# Altium PCB PCB.PcbDoc
Units mm, origin at the board's own origin, x right, y up, seen from the top; angles counter-clockwise.
Board outline 42.93 x 45.72 mm, 2 copper layers (Top Layer, Bottom Layer); 12 components, 13 nets, 57 pads, 4 vias.
Unrouted connection lines stored in the file: 3.
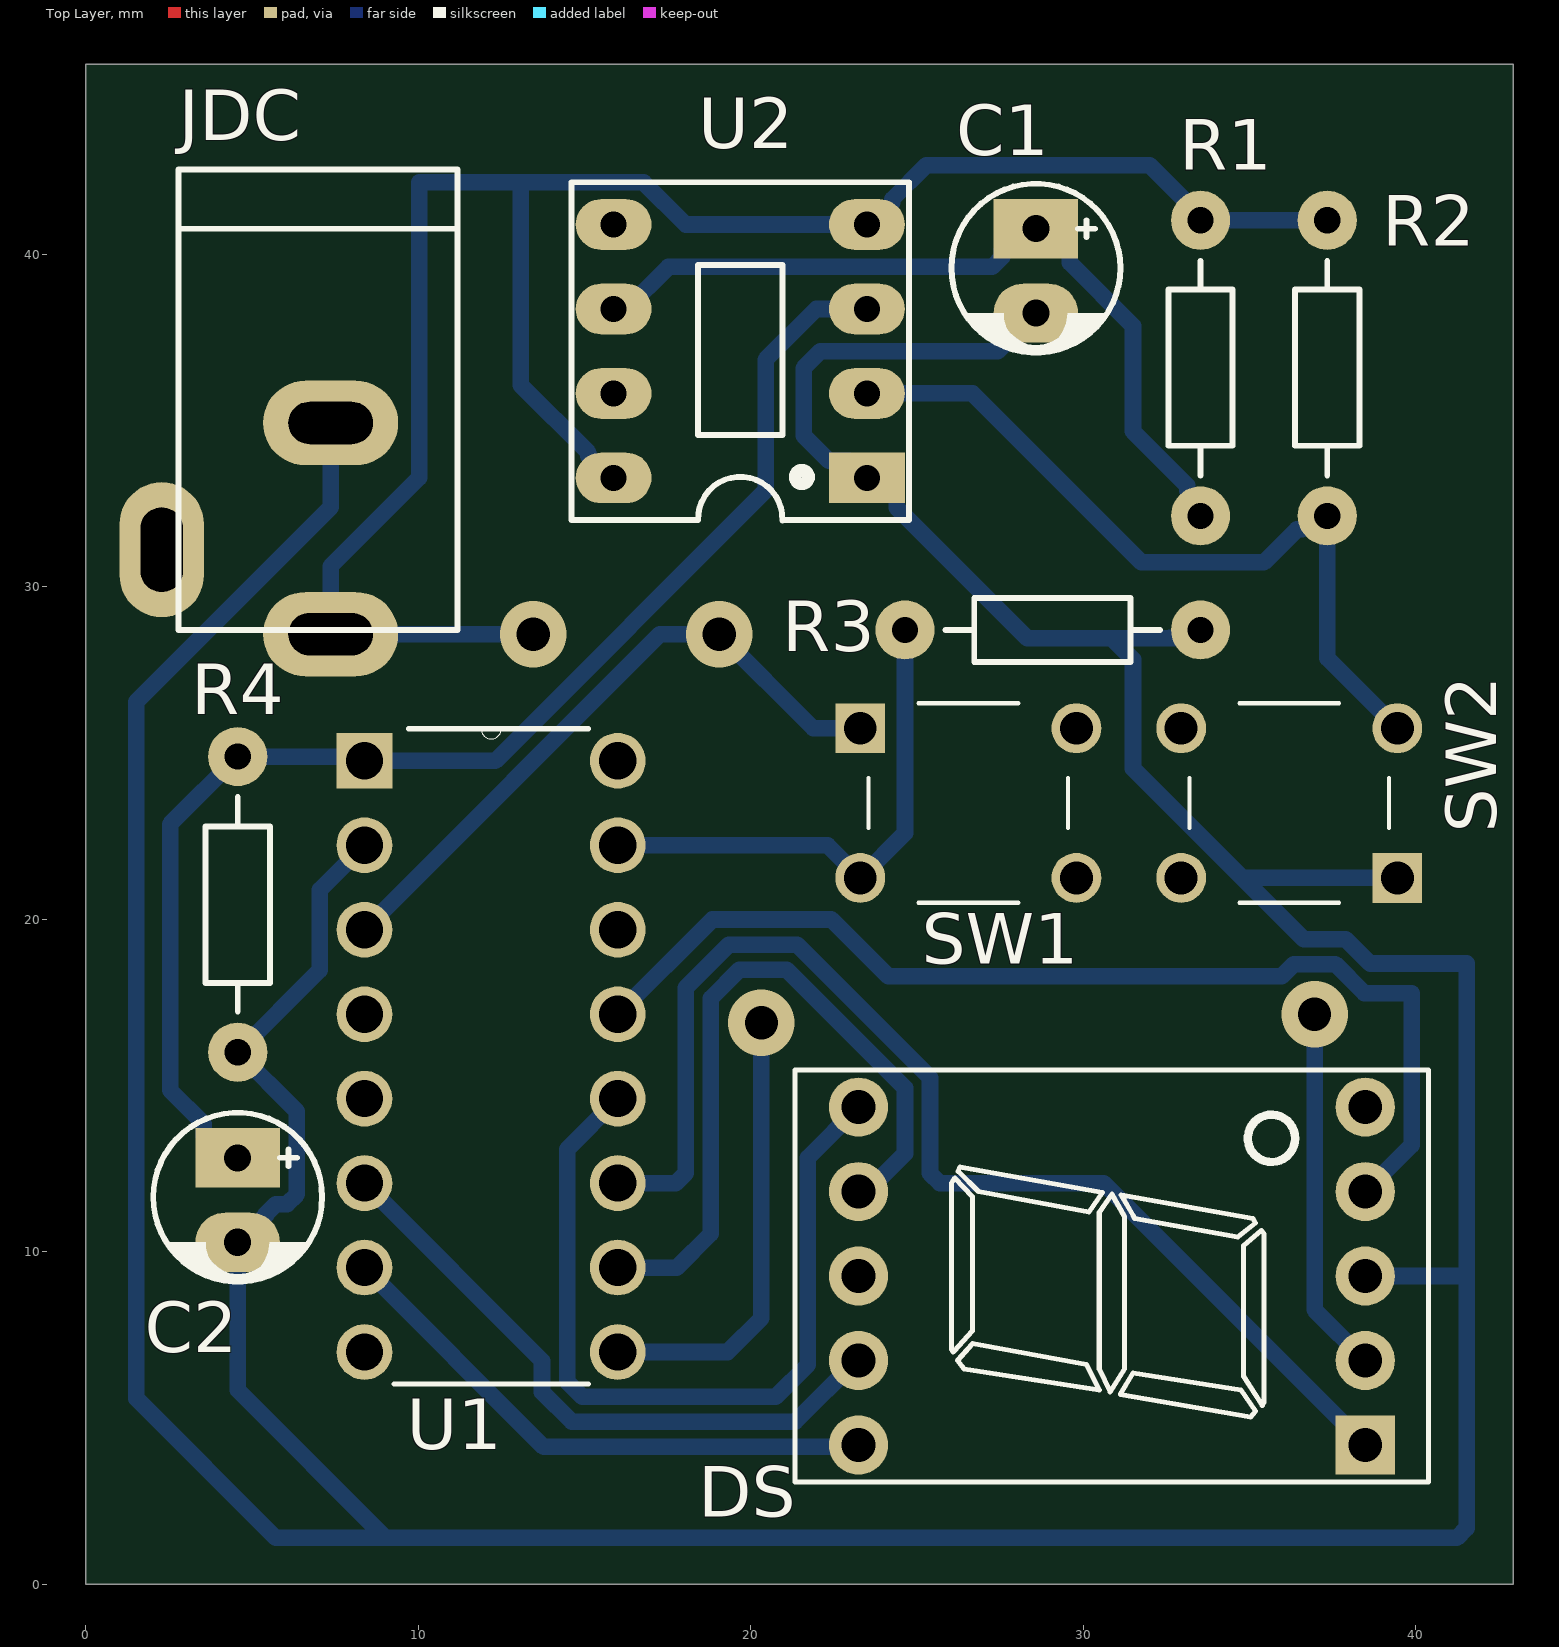
[diagram p0: Top Layer view]
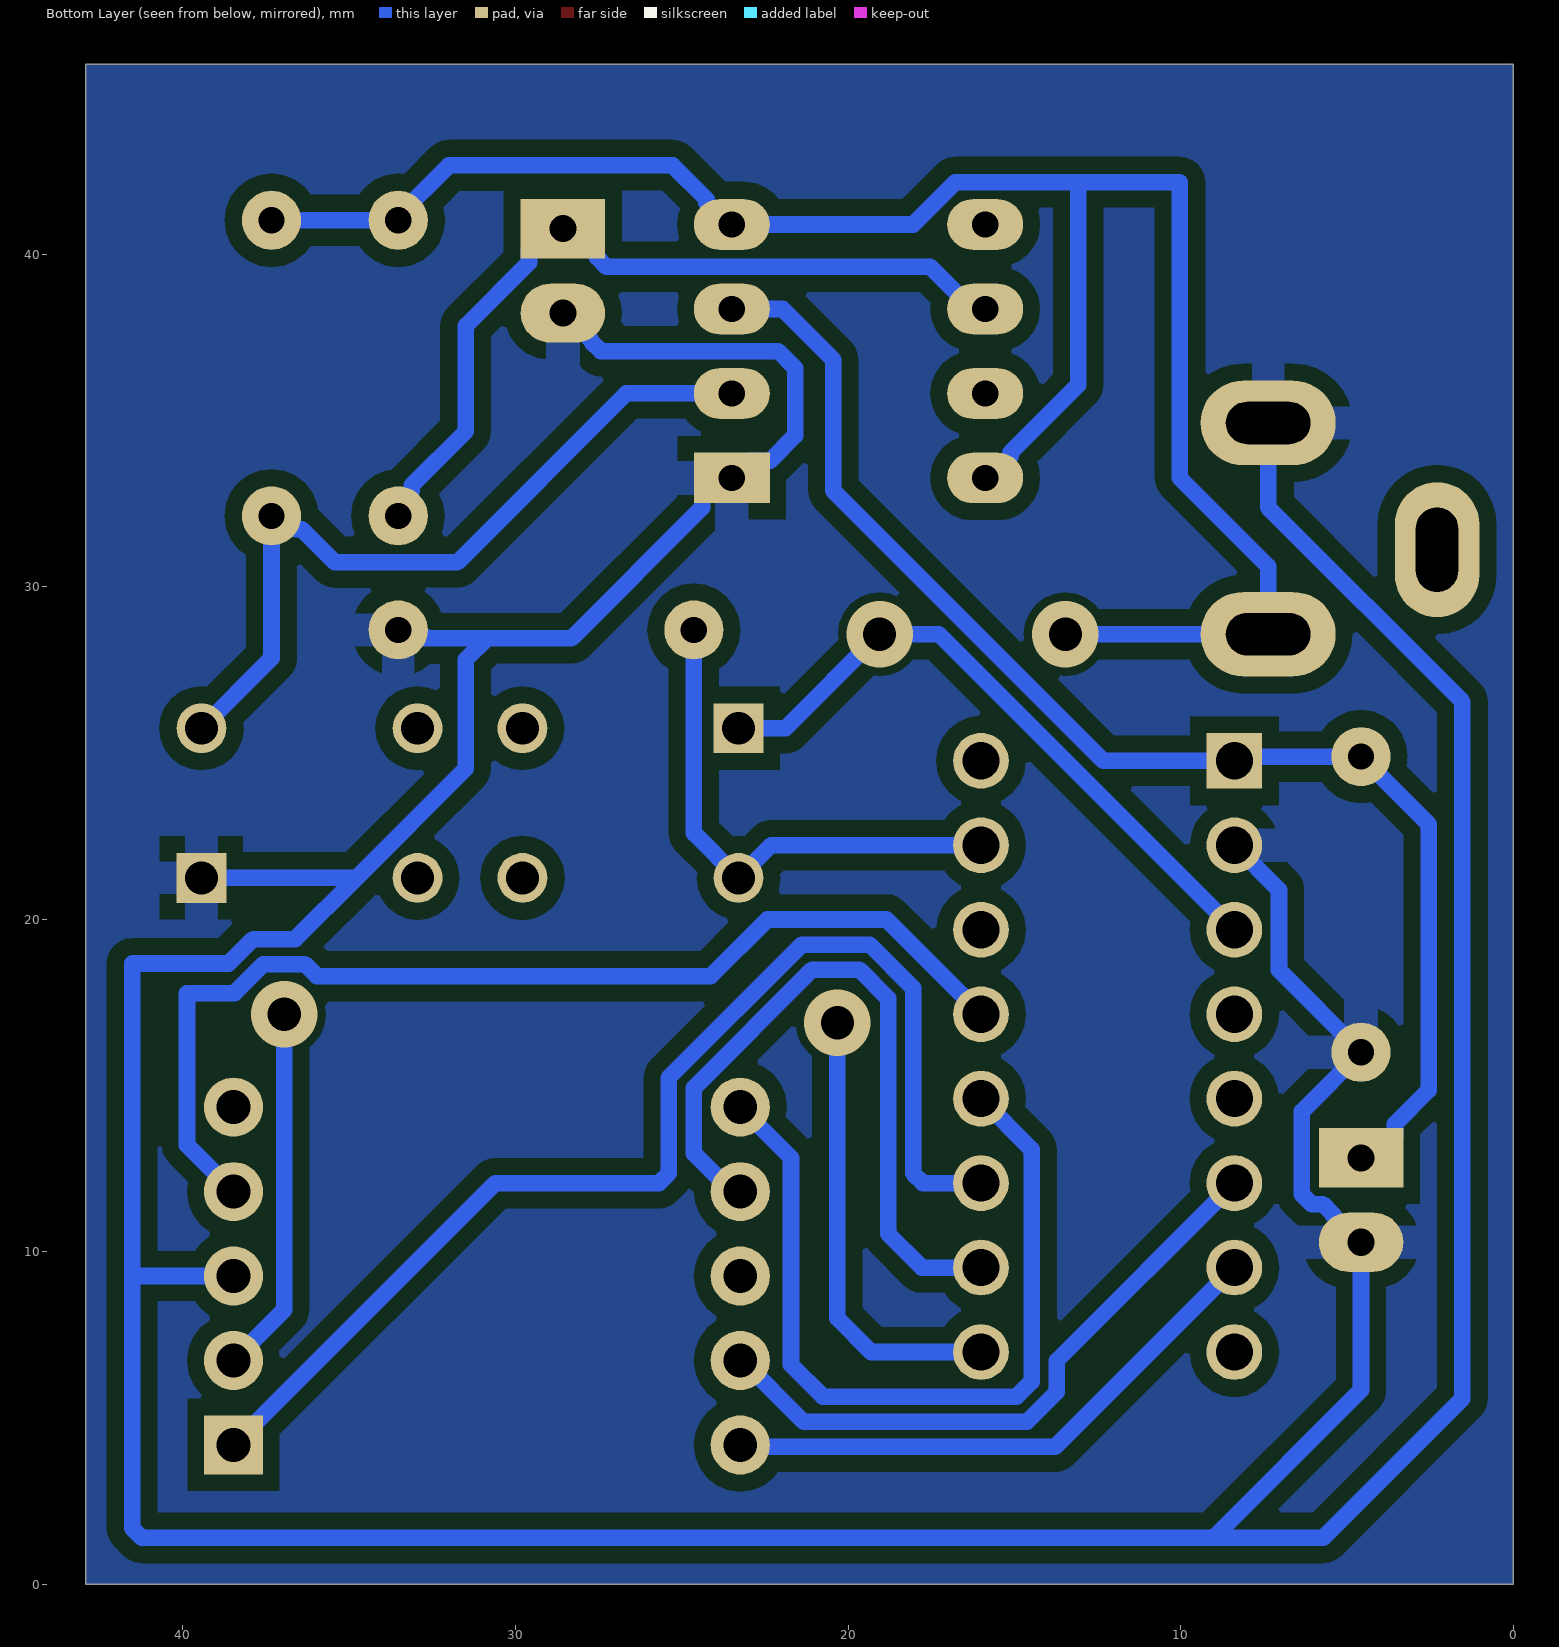
[diagram p1: Bottom Layer view, seen from below]
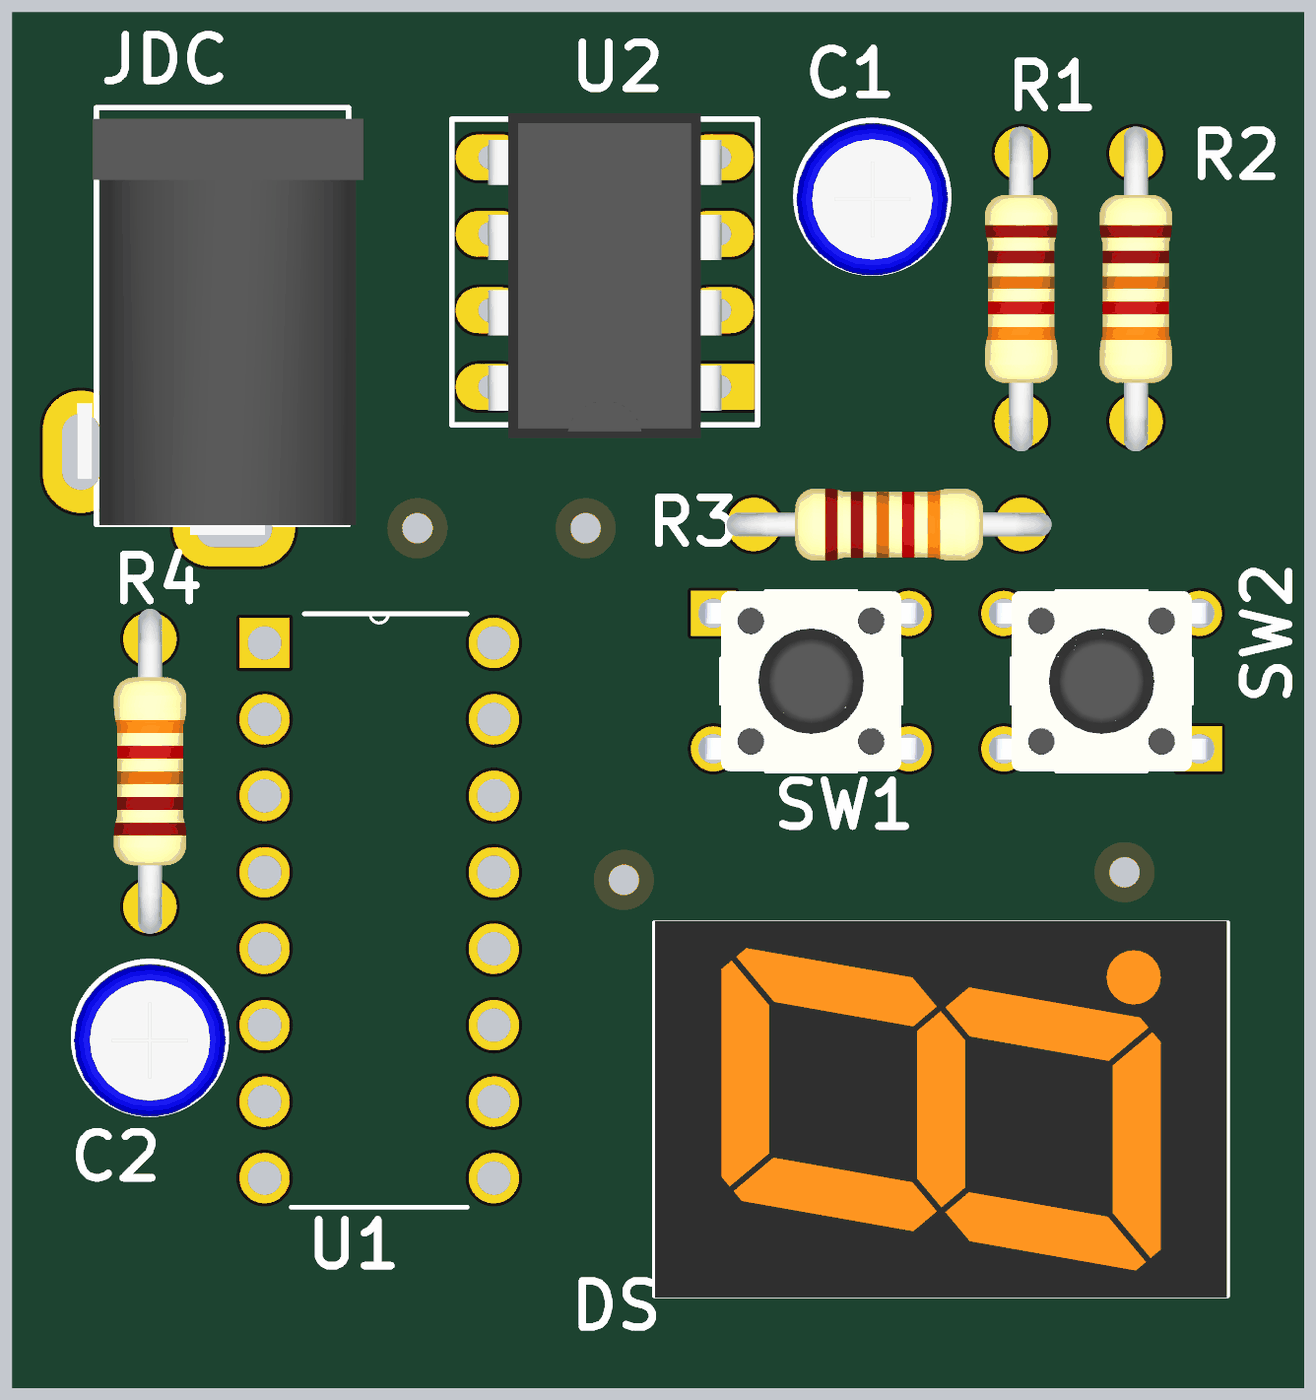
[diagram p2: 3D render of the assembled board from above, using the file's embedded part models]

## Layer stack, top to bottom
Top Solder: solder mask 0.0102, Solder Resist, Dk 3.5
Top Layer: signal copper 0.0356
Dielectric 1: dielectric 0.32, FR-4, Dk 4.8
Bottom Layer: signal copper 0.0356
Bottom Solder: solder mask 0.0102, Solder Resist, Dk 3.5

## Board outline
0,0 42.926,0 42.926,45.72 0,45.72

## Design rules (kind name [scope] priority, off if disabled: settings)
Clearance Clearance_8 [InNamedPolygon('GND_L02_P014')] p1: gap=0.254 ignorepadtopadclearanceinfootprint=FALSE except(0: Arc-Hole Track-Hole SMDPad-Hole THPad-Hole Via-Hole Fill-Hole Poly-Hole Region-Hole Text-Hole; 0.508: Arc-Fill Arc-Poly Arc-Region Track-Fill Track-Poly Track-Region THPad-Fill THPad-Poly THPad-Region)
Clearance Clearance_7 [InNamedPolygon('GND_L02_P014')] p2: gap=0.254 ignorepadtopadclearanceinfootprint=FALSE except(0: Arc-Hole Track-Hole SMDPad-Hole THPad-Hole Via-Hole Fill-Hole Poly-Hole Region-Hole Text-Hole; 0.508: Arc-Fill Arc-Poly Arc-Region Track-Fill Track-Poly Track-Region THPad-Fill THPad-Poly THPad-Region)
Clearance Clearance_6 [InNamedPolygon('GND_L02_P010')] p3: gap=0.254 ignorepadtopadclearanceinfootprint=FALSE except(0: Arc-Hole Track-Hole SMDPad-Hole THPad-Hole Via-Hole Fill-Hole Poly-Hole Region-Hole Text-Hole; 0.508: Arc-Fill Arc-Poly Arc-Region Track-Fill Track-Poly Track-Region THPad-Fill THPad-Poly THPad-Region)
Clearance Clearance_5 [InNamedPolygon('GND_L02_P014')] p4: gap=0.254 ignorepadtopadclearanceinfootprint=FALSE except(0: Arc-Hole Track-Hole SMDPad-Hole THPad-Hole Via-Hole Fill-Hole Poly-Hole Region-Hole Text-Hole; 0.508: Arc-Fill Arc-Poly Arc-Region Track-Fill Track-Poly Track-Region THPad-Fill THPad-Poly THPad-Region)
Clearance Clearance_4 [InNamedPolygon('NONET_L02_P010')] p5: gap=0.254 ignorepadtopadclearanceinfootprint=FALSE except(0: Arc-Hole Track-Hole SMDPad-Hole THPad-Hole Via-Hole Fill-Hole Poly-Hole Region-Hole Text-Hole; 0.508: Arc-Fill Arc-Poly Arc-Region Track-Fill Track-Poly Track-Region THPad-Fill THPad-Poly THPad-Region)
Clearance Clearance_3 [InNamedPolygon('+5_L02_P002')] p6: gap=0.254 ignorepadtopadclearanceinfootprint=FALSE except(0: Arc-Hole Track-Hole SMDPad-Hole THPad-Hole Via-Hole Fill-Hole Poly-Hole Region-Hole Text-Hole; 0.5: Arc-Fill Arc-Poly Arc-Region Track-Fill Track-Poly Track-Region THPad-Fill THPad-Poly THPad-Region)
Clearance Clearance_2 [InNamedPolygon('+5_L02_P002')] p7: gap=0.254 ignorepadtopadclearanceinfootprint=FALSE except(0: Arc-Hole Track-Hole SMDPad-Hole THPad-Hole Via-Hole Fill-Hole Poly-Hole Region-Hole Text-Hole; 0.508: Arc-Fill Arc-Poly Arc-Region Track-Fill Track-Poly Track-Region THPad-Fill THPad-Poly THPad-Region)
Clearance Clearance_1 [InNamedPolygon('+5_L02_P000')] p8: gap=0.254 ignorepadtopadclearanceinfootprint=FALSE except(0: Arc-Hole Track-Hole SMDPad-Hole THPad-Hole Via-Hole Fill-Hole Poly-Hole Region-Hole Text-Hole; 0.5: Arc-Fill Arc-Poly Arc-Region Track-Fill Track-Poly Track-Region)
Clearance [All] p9: gap=0.254 ignorepadtopadclearanceinfootprint=FALSE except(0: Arc-Hole Track-Hole SMDPad-Hole THPad-Hole Via-Hole Fill-Hole Poly-Hole Region-Hole Text-Hole)
PolygonConnect PolygonConnect_9 [All vs IsNamedPolygon('GND_L02_P014')] p1: connectstyle=Relief reliefconductorwidth=1 reliefentries=4 polygonreliefangle="90 Angle" airgapwidth=0.5
PolygonConnect PolygonConnect_8 [All vs IsNamedPolygon('GND_L02_P014')] p2: connectstyle=Relief reliefconductorwidth=1 reliefentries=4 polygonreliefangle="90 Angle" airgapwidth=0.5
PolygonConnect PolygonConnect_7 [All vs IsNamedPolygon('GND_L02_P010')] p3: connectstyle=Relief reliefconductorwidth=1 reliefentries=4 polygonreliefangle="90 Angle" airgapwidth=0.5
PolygonConnect PolygonConnect_6 [All vs IsNamedPolygon('GND_L02_P014')] p4: connectstyle=Relief reliefconductorwidth=0.254 reliefentries=4 polygonreliefangle="90 Angle" airgapwidth=0.5
PolygonConnect PolygonConnect_5 [All vs IsNamedPolygon('GND_L02_P014')] p5: connectstyle=Relief reliefconductorwidth=1 reliefentries=4 polygonreliefangle="90 Angle" airgapwidth=0.5
PolygonConnect PolygonConnect_4 [All vs IsNamedPolygon('GND_L02_P010')] p6: connectstyle=Relief reliefconductorwidth=1 reliefentries=4 polygonreliefangle="90 Angle" airgapwidth=0.5
PolygonConnect PolygonConnect_3 [All vs IsNamedPolygon('GND_L02_P014')] p7: connectstyle=Relief reliefconductorwidth=1 reliefentries=4 polygonreliefangle="90 Angle" airgapwidth=0.5
PolygonConnect PolygonConnect_2 [All vs IsNamedPolygon('GND_L02_P014')] p8: connectstyle=Relief reliefconductorwidth=0.254 reliefentries=4 polygonreliefangle="90 Angle" airgapwidth=0.5
PolygonConnect PolygonConnect_1 [All vs IsNamedPolygon('+5_L02_P000')] p9: connectstyle=Relief reliefconductorwidth=1 reliefentries=4 polygonreliefangle="90 Angle" airgapwidth=0.5
PolygonConnect [All] p10: connectstyle=Relief reliefconductorwidth=0.254 reliefentries=4 polygonreliefangle="90 Angle" airgapwidth=0.254
RoutingVias [All] p1: holewidth=0.711 width=1.27 viastyle="Through Hole" minholewidth=0.711 minwidth=1.27 maxholewidth=0.711 maxwidth=1.27
SolderMaskExpansion [All] p1: expansion=0.102
Width [All] p1: maxlimit=2 minlimit=0.254 preferedwidth=1 toplayer_maxwidth=0.254 toplayer_prefwidth=0.254 bottomlayer_minwidth=0.5 minimp=50.000000 maximp=50.000000 favimp=50.000000
30 further rules are at their usual default settings.

## Components (designator, comment, footprint, x,y, rotation, side; value= is the part's Value field where it differs from the comment)
C1 "1uF" CP1/2 28.575,40.767 r270 top value=10uF/50V
C2 "22uF" CP1/2 4.572,12.827 r270 top value=10uF/50V
DS "7SEG" LED7SEG-1-0.56 31.496,9.144 r90 top
JDC "Jac DC" DC0 4.826,31.75 r270 top
R1 "10K" R1/4W 33.528,32.131 r90 top value="R1/4W - 1K"
R2 "10K" R1/4W 37.338,32.131 r90 top value="R1/4W - 1K"
R3 "10K" R1/4W 33.528,28.702 r180 top value="R1/4W - 1K"
R4 "100K" R1/4W 4.572,24.892 r270 top value="R1/4W - 1K"
SW1 "3-1825910-1" TE_3-1825910-1 26.543,23.495 r0 top
SW2 "3-1825910-1" TE_3-1825910-1 36.195,23.495 r180 top
U1 "CD4026BE" DIP254P762X508-16 16.002,6.985 r0 top
U2 "NE555" DIP8 19.685,36.957 r90 top

## Footprints (in the part's own frame and the unit in brackets; to place one, negate y for a bottom-side part, rotate by r counter-clockwise, add the part's x,y. Pads: shape width x height; smd on the part's side, far side on the other; paste and mask are expansions set on the pad)
CP1/2 [mil] "Tu hoa < 22uF/16>50V"
  rect 70x100 hole 32: 1(0,0)
  oval 70x100 hole 32: 2(100,0)
  silkscreen extent -53,-100 146,100, body extent -49,-99 149,99, height 287
DC0 [mil] "Jac DC input"
  oval 100x160 hole 50 slot 100 at 90 deg: 1(125,100) 2(-125,100)
  oval 160x100 hole 50 slot 100 at 0 deg: 3(25,-100)
  silkscreen extent -425,-80 120,250, body extent -410,-105 134,269, height 434
DIP8 [mil] "DIP, 8-Leads, Row Spacing 7.62mm, Pitch 2.54mm, Body 9.91x6.73mm"
  rect 60x90 hole 31: 1(-145,-150)
  oval 60x90 hole 31: 2(-45,-150) 3(55,-150) 4(155,-150) 5(155,150) 6(55,150) 7(-45,150) 8(-145,150)
  silkscreen extent -195,-200 205,200, body extent -213,-153 213,153, height 177
DIP254P762X508-16 [mil]
  rect 66x66 hole 44: 1(-300,700)
  round 66 hole 44: 2(-300,600) 3(-300,500) 4(-300,400) 5(-300,300) 6(-300,200) 7(-300,100) 8(-300,0) 9(0,0) 10(0,100) 11(0,200) 12(0,300) 13(0,400) 14(0,500) 15(0,600) 16(0,700)
  silkscreen extent -265,-38 -35,738
LED7SEG-1-0.56 [mil]
  rect 70x70 hole 40: 1(-195,-275)
  round 70 hole 40: 2(-95,-275) 3(5,-275) 4(105,-275) 5(205,-275) 6(205,325) 7(105,325) 8(5,325) 9(-95,325) 10(-195,325)
  silkscreen extent -239,-350 249,400, body extent -241,-349 251,399, height 315
R1/4W [mil] "R 1/4W, 2 Pin, 350mil"
  round 70 hole 31: 1(0,0) 2(350,0)
  silkscreen extent 48,-38 302,38, body extent -40,-47 386,47, height 111
TE_3-1825910-1 [mm]
  rect 1.498x1.498 hole 0.99: 1(-3.25,2.25)
  round 1.498 hole 0.99: 2(3.25,2.25) 3(-3.25,-2.25) 4(3.25,-2.25)
  silkscreen extent -3,-3 3,3, body extent -3.9,-2.99 3.9,3, height 17.02

## Part data
C1 C2: library part CP1, "Cap P  0,1uF < 22uF , 16 - 50V", Description 1="10 => 220uF/6,3V/10V - 10uF => 100uF/16V", Description 2="0,1uF => 33uF/50V - 10uF => 22uF/63V", Description 3="0,47uF => 10uF/100V"
DS: library part LED7SEG-1, "14.2 mm General Purpose Blue 7-Segment Display: CC, RH DP, Gray Surface", Colour=Blue, PackageDocument=24-Sep-2002, ComponentLink1Description="Manufacturer Link", ComponentLink1URL=http://www.agilent.com/, DatasheetDocument=24-Sep-2002, LatestRevisionDate=17-Dec-2003, LatestRevisionNote="Schematic revised, PCB Footprint replaced.", MinimumIntensity="2020 ucd", Note="IF = 10 mA", PackageReference=H, Published=8-Jun-2000, Publisher="Altium Limited"
JDC: library part DCIN, "Jac DC input"
R1 R2 R3 R4: library part R, "Resistor 1/4W"
SW1 SW2: "Switch Push Button OFF _ON_ SPST Round Button 0.05A 24VDC Momentary Contact PC Pins Thru-Hole", Package=None, Availability=Unavailable, EU_RoHS_Compliance=Compliant, MF="TE Connectivity", MP=3-1825910-1, Price=None, SnapEDA_Link=https://www.snapeda.com/parts/3-1825910-1/TE%20Connectivity%20ALCOSWITCH%20Switches/view-part/452461/?ref=snap, TE_purchase_URL=https://www.te.com/usa-en/product-3-1825910-1.html?te_bu=Cor&te_type=disp&te_campaign=seda_glo_cor-seda-global-disp-prtnr-fy19-seda-model-bom-cta_sma-317_1&elqCampaignId=32493
U1: "Counter IC Counter, Decade 1 Element 5 Bit Positive Edge 16-PDIP", Package="PDIP-16 Harris", Availability=Unavailable, MF="Texas Instruments", MP=CD4026BE, Price=None, SnapEDA_Link=https://www.snapeda.com/parts/CD4026BE/Texas%20Instruments/view-part/779031/?ref=snap
U2: "TIMER IC", Current=200mA, Frequency=500kHz, Manufacturer=STMicroelectronics, Manufacturer Part Number=NE555DT, Operating Temperature="0°C ~ 70°C", Package / Case="8-SOIC (3.9mm Width)", Supplier Part Number=497-1962-2-ND, Voltage - Supply="4.5 V ~ 16 V", Category="Integrated Circuits (ICs)", Count=-, Packaging="Tape & Reel (TR)", RoHS="RoHS Compliant", Supplier=Digi-Key, Supplier 1=Digi-Key, Supplier Part Number 1=497-1962-2-ND, Type="555 Type, Timer/Oscillator (Single)"

## Via types
v1: diameter 2, hole 1, Top Layer to Bottom Layer, tented both sides, 4 vias

## Nets (pads, with @x,y where several pads share a name; then routed paths per layer and width w, separated by ;. In a path a pad name is that pad's centre, name@x,y a point inside that pad or via, vN(x,y) a via of type N, cw(c..) or ccw(c..) an arc to the next point about the centre after c; other vN are vias at no path point)
+5: JDC.1 R1.2 R2.2 SW1.1 U1.3 U2.4 U2.8 | length 80
  Bottom Layer w0.5: U1.3 17.272,28.575 v1(19.05,28.575) 21.88,25.745 SW1.1 ; v1(13.462,28.575) JDC.1 7.366,30.615 10.029,33.278 10.029,42.16 13.081,42.16 ; U2.8 15.771,33.274 15.115,33.93 15.115,34.034 13.081,36.068 13.081,42.16 ; R2.2 R1.2 33.528,41.148 32.004,42.672 25.273,42.672 24.255,41.654 24.255,41.55 23.599,40.894 U2.4 18.046,40.894 16.78,42.16 13.081,42.16
GND: C1.2 C2.2 DS.3 JDC.2 R3.1 R4.2 SW2.1 U1.2 U2.1 | length 165.4
  Bottom Layer w0.5: JDC.2 7.366,32.385 1.524,26.543 1.524,5.588 5.715,1.397 9.017,1.397 ; U1.2 7.04,20.883 7.04,18.47 R4.2 6.35,14.224 6.35,11.727 6.057,11.434 5.719,11.434 5.421,11.136 5.421,11.101 4.607,10.287 C2.2 4.572,5.842 9.017,1.397 ; C1.2 28.54,38.227 27.726,37.413 27.726,37.378 27.432,37.084 22.098,37.084 21.59,36.576 21.59,34.544 22.348,33.786 22.983,33.786 U2.1 23.876,33.274 24.388,32.762 24.388,32.381 28.321,28.448 30.861,28.448 ; R3.1 33.283,28.457 32.606,28.457 32.596,28.448 30.861,28.448 ; DS.3 41.529,9.271 ; SW2.1 34.784,21.245 ; 9.017,1.397 25.019,1.397 41.236,1.397 41.529,1.69 41.529,9.271 ; 30.861,28.448 31.496,27.813 31.496,24.533 34.784,21.245 ; 34.784,21.245 36.626,19.403 37.892,19.403 38.626,18.669 41.529,18.669 41.529,9.271
NetC1_1: C1.1 R1.1 U2.6 U2.7 | length 24.7
  Bottom Layer w0.5: U2.6 16.256,38.354 17.522,39.62 27.262,39.62 27.555,39.913 27.555,40.128 28.194,40.767 C1.1 28.956,40.767 29.595,40.128 29.595,39.747 31.496,37.846 31.496,34.671 33.123,33.044 33.123,32.882 33.528,32.477 R1.1
NetC2_1: C2.1 R4.1 U1.1 U2.3 | length 40.9
  Bottom Layer w0.5: C2.1 4.191,12.827 3.552,13.466 3.552,13.847 2.54,14.859 2.54,22.86 R4.1 8.255,24.892 U1.1 12.319,24.765 20.447,32.893 20.447,36.83 21.971,38.354 U2.3
NetDS_1: DS.1 U1.11 | length 36.6
  Bottom Layer w0.5: U1.11 17.749,12.065 18.042,12.358 18.042,17.933 19.347,19.238 21.39,19.238 25.392,15.236 25.392,12.358 25.685,12.065 30.607,12.065 DS.1
NetDS_2: DS.2 U1.9 | length 24.7
  Bottom Layer w0.5: U1.9 19.304,6.985 20.32,8.001 v1(20.32,16.891) ; v1(36.957,17.145) 36.957,8.255 DS.2
NetDS_4: DS.4 U1.13 | length 32.8
  Bottom Layer w0.5: U1.13 18.849,19.992 22.426,19.992 24.13,18.288 35.973,18.288 36.334,18.649 37.58,18.649 38.449,17.78 39.878,17.78 39.878,13.208 DS.4
NetDS_6: DS.6 U1.12 | length 25.3
  Bottom Layer w0.5: U1.12 14.478,13.081 14.478,6.096 14.931,5.643 20.756,5.643 21.717,6.604 21.717,12.827 DS.6
NetDS_7: DS.7 U1.10 | length 21.8
  Bottom Layer w0.5: U1.10 17.78,9.525 18.796,10.541 18.796,17.621 19.659,18.484 21.078,18.484 24.638,14.924 24.638,12.954 23.495,11.811 DS.7
NetDS_9: DS.9 U1.6 | length 19.1
  Bottom Layer w0.5: U1.6 13.724,6.723 13.724,5.784 14.619,4.889 21.336,4.889 23.178,6.731 DS.9
NetDS_10: DS.10 U1.7 | length 17.1
  Bottom Layer w0.5: U1.7 13.772,4.135 23.185,4.135 DS.10
NetR2_1: R2.1 SW2.3 U2.2 | length 23.8
  Bottom Layer w0.5: U2.2 26.67,35.814 31.75,30.734 35.433,30.734 36.425,31.726 36.587,31.726 36.992,32.131 R2.1 37.338,27.852 SW2.3
NetR3_2: R3.2 SW1.3 U1.15 | length 15.7
  Bottom Layer w0.5: U1.15 22.313,22.225 SW1.3 24.638,22.59 R3.2
pads on no net: DS.5 DS.8 JDC.3 SW1.2 SW1.4 SW2.2 SW2.4 U1.4 U1.5 U1.8 U1.14 U1.16 U2.5

## Polygon pours and split planes (outlines as drawn)
GND on Bottom Layer "GND_L02_P014" (solid, pour order 14): 0,45.847 0.127,45.72 42.926,45.72 42.926,0 0,0
GND on Bottom Layer "GND_L02_P010" (solid, pour order 10): 0,45.847